# Altium PCB IO.PcbDoc
Units mm, origin at the board's own origin, x right, y up, seen from the top; angles counter-clockwise.
Board outline 41 x 13.02 mm, 4 copper layers (Top Layer, s, GND, Bottom Layer), stack 1.782 mm thick; 17 components, 57 nets, 142 pads, 75 vias.
Unrouted connection lines stored in the file: 2.
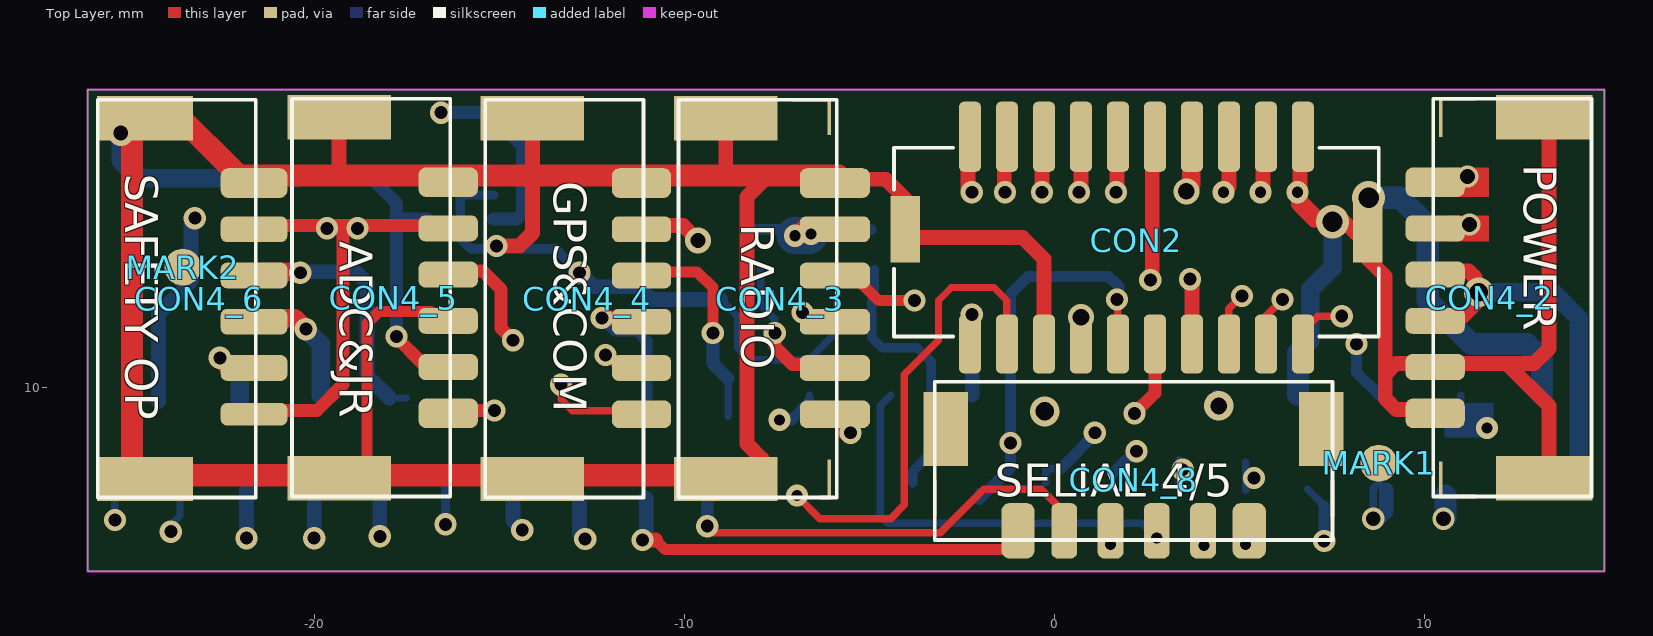
[diagram p0: Top Layer view]
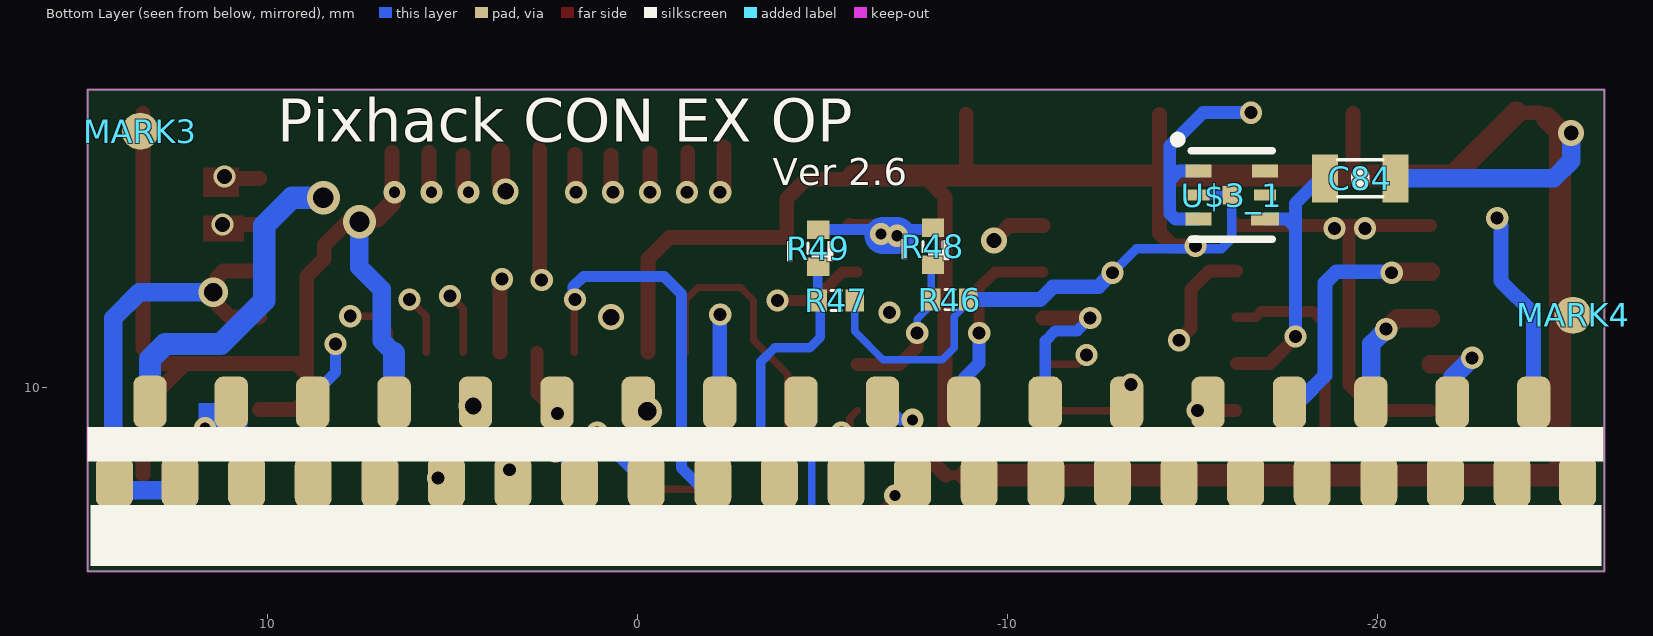
[diagram p1: Bottom Layer view, seen from below]
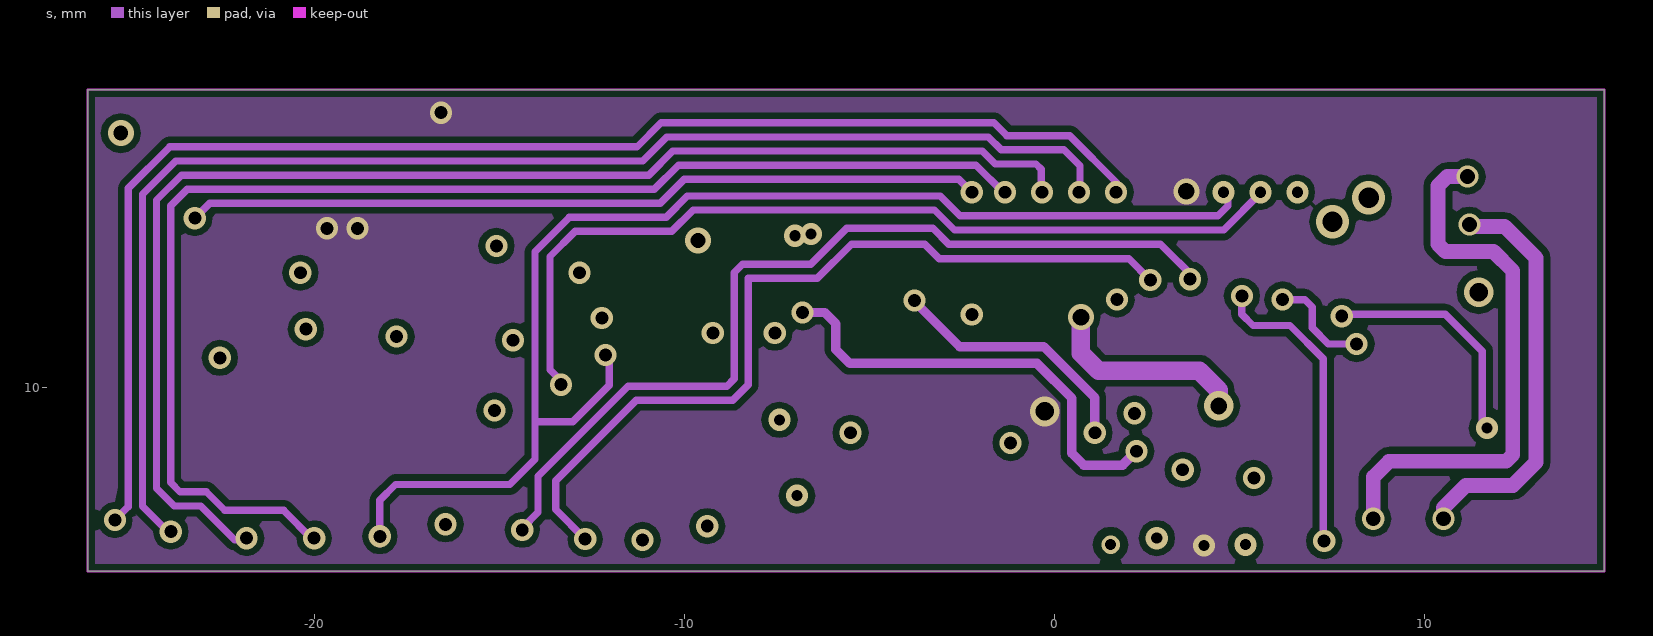
[diagram p2: s]
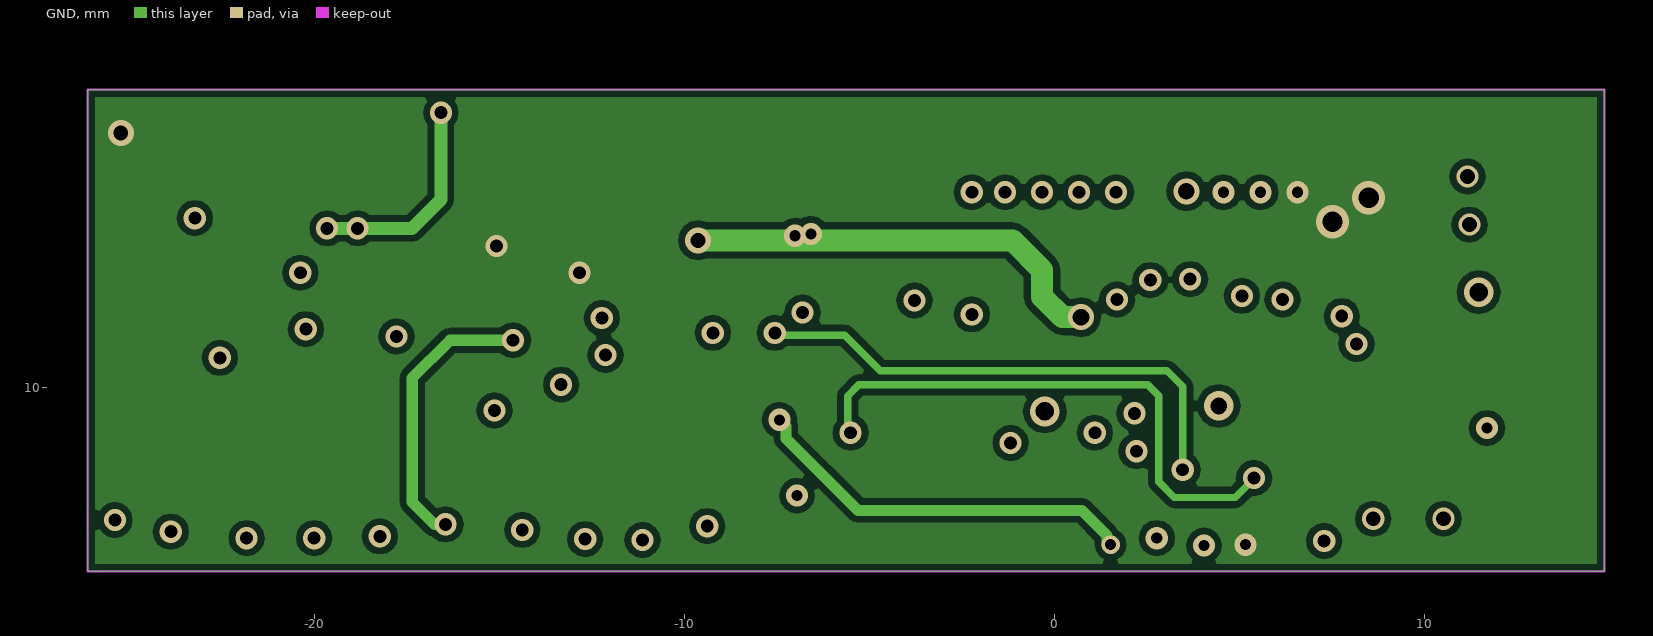
[diagram p3: GND]
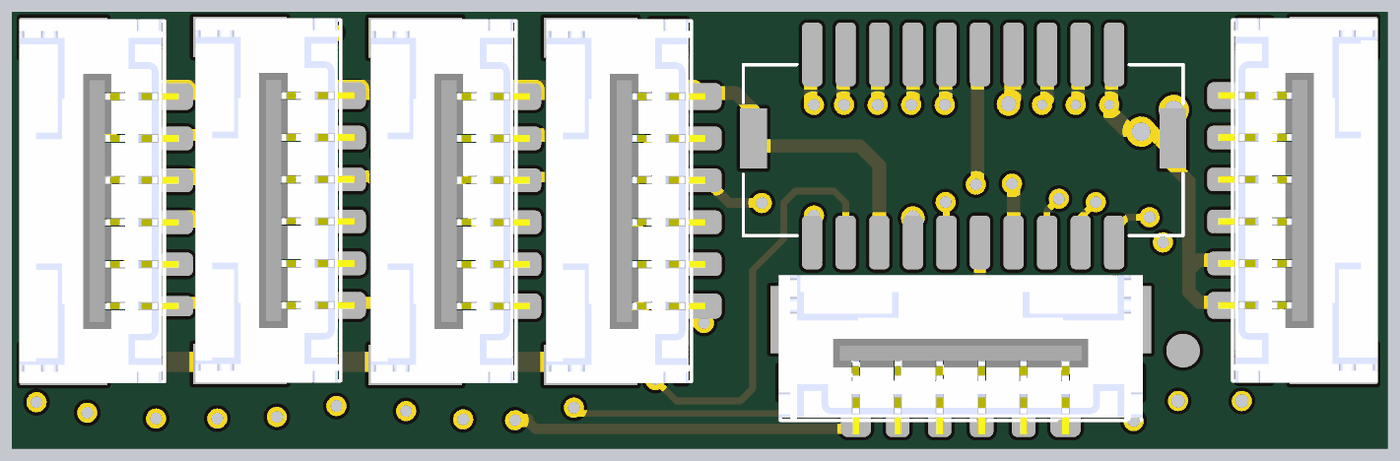
[diagram p4: 3D render of the assembled board from above, using the file's embedded part models]
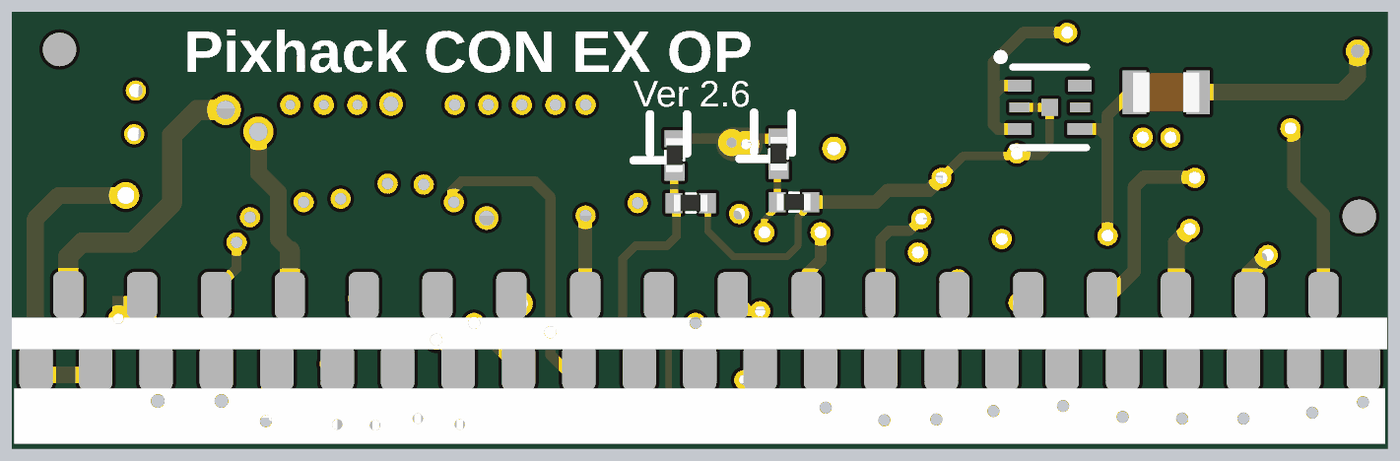
[diagram p5: 3D render of the assembled board from below, using the file's embedded part models]

## Layer stack, top to bottom
Top Layer: signal copper 0.0356
Dielectric: core 1, FR-4, Dk 4.8
s: signal copper 0.0356
Dielectric: prepreg 0.32, FR-4, Dk 4.8
GND: signal copper 0.0356
Dielectric: core 0.32, FR-4, Dk 4.8
Bottom Layer: signal copper 0.0356

## Board outline
-26.125,18.05 -26.125,5.025 14.875,5.025 14.875,18.05

## Design rules (kind name [scope] priority, off if disabled: settings)
Clearance [All] p1: gap=0.18
PolygonConnect [All vs OnLayer('Multi-Layer')] p1: connectstyle=Direct reliefconductorwidth=0.254 reliefentries=4 polygonreliefangle="90 Angle"
RoutingVias [All] p1: holewidth=0.711 width=1.27 viastyle="Through Hole" minholewidth=0.711 minwidth=1.27 maxholewidth=0.711 maxwidth=1.27
SilkscreenOverComponentPads [All] p1: minsilkscreentomaskgap=0.254
SolderMaskExpansion [All] p1: expansion=0.102
Width [All] p1: maxlimit=1 minlimit=0.2 preferedwidth=0.254 minimp=50.000000 maximp=50.000000 favimp=50.000000
27 further rules are at their usual default settings.

## Components (designator, comment, footprint, x,y, rotation, side; value= is the part's Value field where it differs from the comment)
C84 "2U2" 0805_CAP -19.525,15.65 r0 bottom
CON2 "SHD1X20" SHD1X20 2,13.875 r0 top
CON4_2 "POWER" GH1.25-6#1 10.2,12.45 r90 top
CON4_3 "RADIO" GH1.25-6#2 -5.825,12.375 r270 top
CON4_4 "GPS&COM" GH1.25-6#3 -11.05,12.375 r270 top
CON4_5 "ADC&JR" GH1.25-6#4 -16.275,12.4 r270 top
CON4_6 "SAFETY OP" GH1.25-6#5 -21.525,12.375 r270 top
CON4_8 "SELIAL 4/5" GH1.25-6#6 2.125,5.825 r180 top
MARK1 "" MARK 8.775,7.95 r90 top
MARK2 "" MARK -23.55,13.25 r90 top
MARK3 "" MARK 13.45,16.925 r270 bottom
MARK4 "" MARK -25.275,11.95 r270 bottom
R46 "100k" ? -8.425,12.375 r0 bottom
R47 "100k" ? -5.35,12.35 r0 bottom
R48 "100k" ? -7.975,13.825 r90 bottom
R49 "100k" ? -4.875,13.775 r90 bottom
U$3_1 "MIC5219-3V3" MLF-6 -16.05,15.2 r180 bottom (schematic designator U$3)

## Footprints (in the part's own frame and the unit in brackets; to place one, negate y for a bottom-side part, rotate by r counter-clockwise, add the part's x,y. Pads: shape width x height; smd on the part's side, far side on the other; paste and mask are expansions set on the pad)
0805_CAP [mm]
  rect 0.7x1.3 smd: 1(-0.95,0) 2(0.95,0)
  silkscreen extent -0.6,-0.5 0.6,0.5, body extent -1,-0.6 1,0.6, height 1.2
GH1.25-6#1 [mm]
  rect 1.2x2.6 smd: 0(-4.9,-3.05) 0(4.85,-3.05)
  rrect50% 0.8x1.6 smd: 1(-3.15,-0.1) 6(3.1,-0.1)
  rrect50% 0.7x1.6 smd: 2(-1.9,-0.1) 3(-0.65,-0.1) 4(0.6,-0.1) 5(1.85,-0.1)
  silkscreen extent -5.4,-4.32 5.35,-0.05, body extent -5.45,-4.38 5.4,0.37, height 4.5
GH1.25-6#2 [mm]
  rect 1.2x2.8 smd: 0(-4.9,-3.05) 0(4.85,-3.05)
  rrect50% 0.8x1.9 smd: 1(-3.15,-0.1)
  rrect50% 0.7x1.9 smd: 2(-1.9,-0.1) 3(-0.65,-0.1) 4(0.6,-0.1) 5(1.85,-0.1)
  rrect50% 0.75x1.9 smd: 6(3.1,-0.1)
  silkscreen extent -5.4,-4.32 5.35,-0.05, body extent -5.45,-4.38 5.4,0.37, height 4.5
GH1.25-6#3 [mm]
  rect 1.2x2.8 smd: 0(-4.9,-3.05) 0(4.85,-3.05)
  rrect50% 0.8x1.6 smd: 1(-3.15,-0.1)
  rrect50% 0.7x1.6 smd: 2(-1.9,-0.1) 3(-0.65,-0.1) 4(0.6,-0.1) 5(1.85,-0.1)
  rrect50% 0.75x1.6 smd: 6(3.1,-0.1)
  silkscreen extent -5.4,-4.32 5.35,-0.05, body extent -5.45,-4.38 5.4,0.37, height 4.5
GH1.25-6#4 [mm]
  rect 1.2x2.8 smd: 0(-4.9,-3.05) 0(4.85,-3.05)
  rrect50% 0.8x1.6 smd: 1(-3.15,-0.1) 6(3.1,-0.1)
  rrect50% 0.7x1.6 smd: 2(-1.9,-0.1) 3(-0.65,-0.1) 4(0.6,-0.1) 5(1.85,-0.1)
  silkscreen extent -5.4,-4.32 5.35,-0.05, body extent -5.45,-4.38 5.4,0.37, height 4.5
GH1.25-6#5 [mm]
  rect 1.2x2.6 smd: 0(-4.9,-3.05) 0(4.85,-3.05)
  rrect50% 0.8x1.8 smd: 1(-3.15,-0.1)
  rrect50% 0.7x1.8 smd: 2(-1.9,-0.1) 3(-0.65,-0.1) 4(0.6,-0.1) 5(1.85,-0.1)
  rrect50% 0.6x1.8 smd: 6(3.1,-0.1)
  silkscreen extent -5.4,-4.32 5.35,-0.05, body extent -5.45,-4.38 5.4,0.37, height 4.5
GH1.25-6#6 [mm]
  rect 1.2x2 smd: 0(-5.1,-3.05) 0(5.05,-3.05)
  rrect50% 0.9x1.5 smd: 1(-3.15,-0.3) 6(3.1,-0.3)
  rrect50% 0.7x1.5 smd: 2(-1.9,-0.3) 3(-0.65,-0.3) 4(0.6,-0.3) 5(1.85,-0.3)
  silkscreen extent -5.4,-4.32 5.35,-0.05, body extent -5.45,-4.38 5.4,0.37, height 4.5
MARK [mm]
  round 1 smd: 1(0,0)
MLF-6 [mm]
  rect 0.7x0.35 smd: 1(-0.9,0.65) 3(-0.9,-0.65) 6(0.9,0.65)
  rect 0.6x0.3 smd: 2(-0.9,0) 5(0.9,0)
  rect 0.75x0.35 smd: 4(0.9,-0.65)
  rect 0.5x0.5 smd: 7(0,0)
  silkscreen extent -1.52,-1.2 1.1,1.56, body extent -1.3,-0.9 1.3,0.9, height 1
SHD1X20 [mm]
  rect 0.8x1.8 smd: 0(-6.025,0.4) 0(6.475,0.4)
  rrect50% 0.6x1.6 smd: 1(-4.275,-2.7) 2(-3.275,-2.7) 3(-2.275,-2.7) 4(-1.275,-2.7) 5(-0.275,-2.7) 6(0.725,-2.7) 7(1.725,-2.7) 8(2.725,-2.7) 9(3.725,-2.7) 10(4.725,-2.7)
  rrect50% 0.6x1.9 smd: 11(4.725,2.9) 12(3.725,2.9) 13(2.725,2.9) 14(1.725,2.9) 15(0.725,2.9) 16(-0.275,2.9) 17(-1.275,2.9) 18(-2.275,2.9) 19(-3.275,2.9) 20(-4.275,2.9)
  silkscreen extent -6.32,-2.5 6.78,2.6
? [mm]
  rect 0.5x0.6 smd: 1(0.492,0.001) 2(-0.508,0.001)
  silkscreen extent -0.15,-0.27 0.12,0.28, body extent -0.5,-0.25 0.5,0.25, height 0.3

## Free pads (board coordinates)
  rect 1x0.1 smd: 0(-6.6,17.775) 0(10.9,7.05) 0(10.9,17.8)
  rect 0.3x0.1 smd: 0(-6.175,7.025)
  rect 0.1x1 smd: 0(-6.075,7.55) 0(-6.075,17.325) 0(-3.225,7) 0(7.525,7) 0(10.45,7.5) 0(10.45,17.275)
  rrect50% 0.9x1.4 smd far side: 1(-24.211,9.592) 2(-22.011,9.592) 3(-19.811,9.592) 4(-17.611,9.592) 5(-15.411,9.592) 6(-13.211,9.592) 7(-11.011,9.592) 8(-8.811,9.592) 9(-6.611,9.592) 10(-4.411,9.592) 11(-2.211,9.592) 12(-0.011,9.592) 13(2.189,9.592) 14(4.389,9.592) 15(6.589,9.592) 16(8.789,9.592) 17(10.989,9.592) 18(13.189,9.617)
  rrect50% 1x1.4 smd far side: 19(-25.4,7.45) 20(-23.625,7.45) 21(-21.825,7.45) 22(-20.025,7.45) 23(-18.225,7.45) 24(-16.425,7.45) 25(-14.625,7.45) 26(-12.825,7.45) 27(-11.025,7.45) 28(-9.225,7.45) 29(-7.425,7.45) 30(-5.625,7.45) 31(-3.825,7.45) 32(-2.025,7.45) 33(-0.225,7.45) 34(1.575,7.45) 35(3.375,7.45) 36(5.175,7.45) 37(6.975,7.45) 38(8.775,7.45) 39(10.575,7.45) 40(12.375,7.45) 41(14.15,7.45)

## Via types
v1: diameter 0.6, hole 0.35, Top Layer to Bottom Layer, 50 vias
v2: diameter 0.6, hole 0.3, Top Layer to Bottom Layer, 11 vias
v3: diameter 0.6, hole 0.4, Top Layer to Bottom Layer, 4 vias
v4: diameter 0.9, hole 0.55, Top Layer to Bottom Layer, 2 vias
v5: diameter 0.7, hole 0.4, Top Layer to Bottom Layer, 2 vias
v6: diameter 0.7, hole 0.45, Top Layer to Bottom Layer, 2 vias
v7: diameter 0.8, hole 0.5, Top Layer to Bottom Layer, 2 vias
v8: diameter 0.5, hole 0.3, Top Layer to Bottom Layer, 1 vias
v9: diameter 0.8, hole 0.45, Top Layer to Bottom Layer, 1 vias

## Nets (pads, with @x,y where several pads share a name; then routed paths per layer and width w, separated by ;. In a path a pad name is that pad's centre, name@x,y a point inside that pad or via, vN(x,y) a via of type N, cw(c..) or ccw(c..) an arc to the next point about the centre after c; other vN are vias at no path point)
3.3V: 
!IO-LED_SAFETY: CON4_6.5 pad.2 | length 2.5
  Top Layer w0.5: v1(-22.55,10.8) -22.375,10.625 CON4_6.5@-21.425,10.625
  Bottom Layer w0.5: v1(-22.55,10.8) -22.011,10.261 pad.2@-22.011,9.675
!SPI_EXT_NSS: CON2.17 pad.20 | length 38.7
  Top Layer w0.4: v1@0.725,15.275 CON2.17@0.725,16.275
  s w0.2: v1@-23.942,6.092 -24.64,6.79 -24.64,15.223 -23.743,16.12 -11.118,16.12 -10.468,16.77 -1.782,16.77 -1.432,16.42 0.268,16.42 0.7,15.988 v1@0.7,15.275
  Bottom Layer w0.2: v1(-23.875,6.1) -23.875,6.275 -23.625,6.525 pad.20@-23.625,7.25
  other v1: 0.675,15.275
ADC1_PROT: CON2.15 pad.26 | length 27.6
  Top Layer w0.2: CON2.15@2.6,16.425 CON2.15@2.725,16.55
  Top Layer w0.4: v1@2.65,12.9 CON2.15@2.65,16.425
  s w0.2: v1(-12.675,5.9) -13.475,6.7 -13.475,7.475 -11.298,9.652 -8.685,9.652 -8.265,10.073 -8.265,12.95 -6.4,12.95 -5.475,13.875 -3.5,13.875 -3.1,13.475 2.025,13.475 v1(2.6,12.9)
  Bottom Layer w0.2: v1@-12.825,6.05 v1(-12.675,5.9)
  Bottom Layer w0.4: v1@-12.825,6.05 pad.26@-12.825,7
ADC2_PROT: CON2.7 pad.25 | length 27.6
  Top Layer w0.4: CON2.7@3.725,10.95 v1@3.725,12.875
  s w0.2: v1@-14.35,6.225 -13.95,6.625 -13.95,7.6 -11.518,10.032 -8.843,10.032 -8.645,10.23 -8.645,13.107 -8.422,13.33 -6.575,13.33 -5.605,14.3 -3.275,14.3 -2.85,13.875 2.875,13.875 3.825,12.925 v1(3.675,12.925)
  Bottom Layer w0.4: pad.25@-14.625,7.25 -14.625,6.4 v1(-14.375,6.15)
ADC_VCC: 
ALARM: CON4_6.3 pad.4 | length 6.7
  Top Layer w0.5: CON4_6.3@-21.425,13.125 v1@-20.4,13.125
  Bottom Layer w0.2: pad.4@-17.964,9.714 pad.4@-17.514,9.714
  Bottom Layer w0.4: v1@-20.35,13.125 -18.875,13.125 -18.575,12.825 -18.575,10.325 pad.4@-17.964,9.714
  other v1: -20.375,13.1
BATT_CURRENT_SENS_PROT: CON4_2.5 pad.39 | length 12.6
  Top Layer w0.4: CON4_2.5@10.225,14.4 v3(11.225,14.4)
  s w0.4: v3(10.525,6.45) 10.525,6.75 11.125,7.35 12.4,7.35 13.025,7.975 13.025,13.5 12.175,14.35 v3@11.225,14.35
  Bottom Layer w0.2: v3(10.525,6.45) v3@10.575,6.5
  Bottom Layer w0.6: v3@10.575,6.5 pad.39@10.575,7.075
BATT_VOLTAGE_SENS_PROT: CON4_2.6 pad.38 | length 18
  Top Layer w0.4: CON4_2.6@10.225,15.65 v3@11.125,15.65
  s w0.4: v3(8.625,6.45) 8.625,7.575 9.055,8.005 12.218,8.005 12.395,8.182 12.395,13.155 11.875,13.675 10.575,13.675 10.375,13.875 10.375,15.45 10.625,15.7 v3(11.175,15.7)
  Bottom Layer w0.2: v3(8.625,6.45) 8.625,7.275 8.775,7.425 pad.38@8.975,7.225
  Bottom Layer w0.4: v3@8.775,6.45 8.975,6.65 pad.38@8.975,7.225
CAN1_RX: CON2.2 pad.29 | length 12.8
  Top Layer w0.2: v2(-6.95,7.075) -6.33,6.455 -4.42,6.455 -4.05,6.825 -4.05,10.35 -3.125,11.275 -3.125,12.35 -2.775,12.7 -1.625,12.7 -1.275,12.35 CON2.2@-1.275,10.95
CAN1_TX: CON2.1 pad.11 | length 3.2
  Top Layer w0.2: CON2.1@-2.275,10.95 -2.275,11.925 v1(-2.225,11.975)
  Bottom Layer w0.4: pad.11@-2.211,9.792 v1@-2.211,11.975
FMU-I2C1_SCL: CON2.13 CON4_4.5 pad.23 | length 38.3
  Top Layer w0.2: v1(-12.125,10.875) -11.875,10.625 CON4_4.5@-10.95,10.625
  Top Layer w0.4: v2(4.575,15.275) 4.725,15.425 CON2.13@4.725,16.275
  s w0.2: v1@-18.225,5.775 -18.225,6.95 -17.8,7.375 -14.712,7.375 -14.03,8.057 -14.03,9.075 ; v1@-12.025,10.875 -12.025,10.062 -13.012,9.075 -14.03,9.075 ; v2@4.7,15.275 4.7,14.912 4.423,14.635 -2.535,14.635 -3.075,15.175 -9.913,15.175 -10.488,14.6 -13.1,14.6 -14.03,13.67 -14.03,9.075
  Bottom Layer w0.4: v1(-18.225,5.975) pad.23@-18.225,7.25
FMU-I2C1_SDA: CON2.12 CON4_4.6 pad.6 | length 28
  Top Layer w0.2: v1(-13.325,10.075) -13.325,9.675 -13.025,9.375 CON4_4.6@-10.95,9.375
  Top Layer w0.4: v2@5.65,15.275 CON2.12@5.65,16.35
  s w0.2: v1@-13.225,10.075 -13.625,10.475 -13.625,13.538 -12.943,14.22 -10.331,14.22 -9.756,14.795 -3.233,14.795 -2.693,14.255 4.58,14.255 v2@5.6,15.275
  other v2: 5.575,15.275
FMU-UART7_RX: CON4_8.3 pad.10 | length 11.2
  Bottom Layer w0.2: pad.10@-4.411,9.792 -4.7,9.503 -4.7,6.529 -4.496,6.325 2.375,6.325 2.675,6.025 v2@2.675,5.75
  other v2: 2.775,5.925
FMU-UART7_TX: CON4_8.4 pad.9 | length 11.6
  GND w0.3: v2(-7.425,9.125) -7.25,8.95 -7.25,8.625 -5.3,6.675 0.751,6.675 1.425,6.001 v8@1.425,5.75
  Bottom Layer w0.2: pad.9@-6.625,9.778 pad.9@-6.611,9.792
  Bottom Layer w0.3: v2(-7.425,9.125) -7.103,9.125 pad.9@-6.611,9.617
  other v8: 1.525,5.75
FMU-UART8_TX: 
FMU-USART2_RX: 
FMU-USART3_RTS: 
FMU-VDD_3V3: C84.2 CON4_5.5 U$3_1.4 | length 7.7
  Top Layer w0.35: v1@-17.788,11.363 -17.075,10.65 CON4_5.5@-16.175,10.65
  Bottom Layer w0.35: C84.2 -18.45,15.65 -17.775,14.975 -17.775,14.325 ; v1(-17.775,11.375) -17.775,14.325 ; -17.725,14.55 -17.55,14.55 ; U$3_1.4 -17.55,14.55 ; -17.775,14.325 -17.55,14.55
FMU_AUX_ADC1_PROT: 
FMU_AUX_ADC2_PROT: 
GND: C84.1 CON2.0 CON2.3 CON2.11 CON4_2.0 CON4_2.1 CON4_2.2 CON4_3.0 CON4_3.1 CON4_4.0 CON4_4.1 CON4_5.0 CON4_5.1 CON4_5.4 CON4_6.0 CON4_6.1 CON4_8.1 pad.15 pad.18 R46.2 R47.2 U$3_1.2 U$3_1.7 | length 139.3
  Top Layer w0.254: CON4_5.4@-16.85,12.05 -16.7,11.9 CON4_5.4@-16.175,11.9 ; CON4_3.0@-8.875,7.625 CON4_3.0@-8.325,7.625
  Top Layer w0.3: CON4_5.0@-18.575,7.575 -18.575,11.725 -18.25,12.05 CON4_5.4@-16.85,12.05
  Top Layer w0.4: CON4_6.0@-24.375,17.425 CON4_6.0@-23.75,17.425 ; -19.325,15.75 -19.325,17.3 CON4_5.0@-19.325,17.4 ; v1(-15.075,13.825) -14.45,13.825 -14.1,14.175 -14.1,15.725 -14.1,17.275 CON4_4.0@-14.1,17.375 ; -8.875,15.75 CON4_3.0@-8.875,17.375 ; CON4_3.0@-8.325,7.625 -7.888,8.062 -8.3,8.475 -8.3,15.15 -7.825,15.625 CON4_3.1@-5.725,15.625 ; CON4_3.1@-5.825,15.725 CON4_3.1@-5.725,15.625 ; CON2.3@-0.275,10.95 -0.275,13.475 -0.85,14.05 -4.025,14.05 -4.025,15.1 -4.55,15.625 CON4_3.1@-5.725,15.625 ; 6.625,14.975 6.65,14.975 CON2.11@6.65,16.35 ; 7.05,14.575 7.75,14.575 8.475,13.85 8.475,13.475 8.95,13 8.95,10.35 ; 8.975,9.675 9.25,9.4 ; CON4_2.1@10.225,9.4 9.25,9.4 ; CON4_2.0@13.375,7.65 13.375,9.5 12.225,10.65 ; CON4_2.0@13.375,17.4 13.375,11.05 12.975,10.65 12.225,10.65 ; 8.95,10.35 8.95,9.7 9.25,9.4 ; 8.95,10.35 9.25,10.65 12.225,10.65
  Top Layer w0.5: 6.65,14.975 7.05,14.575
  Top Layer w0.6: CON4_6.0@-24.575,17.275 -24.925,16.925 -24.925,7.625 -14.1,7.625 CON4_3.0@-8.875,7.625 ; CON4_6.0@-23.75,17.425 -22.05,15.725 -14.1,15.725 CON4_3.1@-5.825,15.725
  Bottom Layer w0.2: R46.2@-9.008,12.374 -8.55,11.916 -8.55,11.075 -8.225,10.75 -6.625,10.75 -5.858,11.517 R47.2
  Bottom Layer w0.254: U$3_1.2 U$3_1.7 -16.05,14.025 -15.775,13.75 -13.475,13.75 v1(-12.825,13.1)
  Bottom Layer w0.4: v1(-12.825,13.1) -12.448,12.723 -11.223,12.723 -10.874,12.374 R46.2@-9.008,12.374 ; 7.475,13.2 7.525,13.25
  Bottom Layer w0.5: v5(-25.225,16.875) -25.225,16.125 -24.75,15.65 C84.1 ; 6.589,10.925 6.925,11.261 6.925,12.65 7.475,13.2 ; 7.525,13.25 v4(7.525,14.475)
  Bottom Layer w0.6: pad.15@6.589,9.792 6.589,10.925 ; v4(8.5,15.125) 9.35,15.125 10.1,14.375 10.1,12.35 11.275,11.175 12.775,11.175 13.189,10.761 pad.18@13.189,9.792
  other v2: 5.175,5.75 6.575,15.275
GPIO_EXT_1: CON2.20 pad.1 | length 28
  Top Layer w0.2: CON2.20@-2.325,16.5 CON2.20@-2.275,16.55
  Top Layer w0.4: v1@-2.325,15.375 CON2.20@-2.325,16.5
  s w0.2: v1(-23.225,14.575) -22.82,14.98 -10.645,14.98 -9.995,15.63 -2.58,15.63 -2.325,15.375 v1@-2.325,15.175
  Bottom Layer w0.4: pad.1@-24.211,9.617 -24.211,11.989 -23.325,12.875 v1@-23.325,14.375
  other v1: -2.225,15.275
GPS_RX: CON4_4.3 pad.8 | length 5.5
  Top Layer w0.3: CON4_4.3@-10.95,13.125 -9.65,13.125 -9.225,12.7 v1(-9.225,11.475)
  Bottom Layer w0.2: pad.8@-8.811,9.225 pad.8@-8.811,10.236
  Bottom Layer w0.35: v1(-9.225,11.475) -9.225,10.65 pad.8@-8.811,10.236
GPS_TX: CON4_4.4 pad.7 | length 4.4
  Top Layer w0.4: v1(-12.225,11.875) CON4_4.4@-10.95,11.875
  Bottom Layer w0.3: v1(-12.225,11.875) -11.875,11.525 -11.275,11.525 -11.011,11.261 pad.7@-11.011,9.617
IO-USART1_RX: CON4_5.6 pad.5 | length 1
  Top Layer w0.35: CON4_5.6@-16.15,9.375 v1(-15.125,9.375)
IO_UART1_RX: 
IV_IN: CON4_2.3 CON4_2.4 pad.40 pad.41 | length 12.7
  Top Layer w0.4: CON4_2.3@10.225,11.9 11.025,11.9 11.375,12.25 11.375,12.975 11.2,13.15 CON4_2.4@10.225,13.15
  Bottom Layer w0.5: v7(11.475,12.575) 13.475,12.575 14.175,11.875 14.175,7.225 pad.40@12.375,7.225
N$4: U$3_1.6
N$5: 
N$14: 
N$19: 
N$42: 
OP_VCC: CON2.14 CON4_5.2 CON4_6.2 CON4_6.6 CON4_8.2 pad.12 U$3_1.1 U$3_1.3 | length 25.6
  Top Layer w0.35: CON4_6.6@-21.425,9.375 -19.925,9.375 -19.225,10.075 -19.225,14.375 ; CON4_6.2@-21.425,14.375 v1@-18.825,14.375 ; v1@-19.65,14.375 -19.225,14.375 ; CON4_5.2@-16.175,14.4 -16.2,14.375 v1@-18.825,14.375 ; CON4_8.2@4.025,5.875 CON4_8.2@4.03,5.88 ; -19.225,14.375 v1@-18.825,14.375
  Top Layer w0.5: v6@3.7,15.475 CON2.14@3.7,16.35
  GND w0.35: v1(-19.65,14.3) v1(-18.825,14.3) -17.35,14.3 -16.575,15.075 v1(-16.575,17.425)
  Bottom Layer w0.35: v1(-16.575,17.425) -15.275,17.425 -14.375,16.525 -14.375,15.6 ; U$3_1.3 -14.525,14.55 -14.375,14.7 -14.375,15.325 -14.375,15.6 ; U$3_1.1 -14.625,15.85 -14.375,15.6
  other v2: 4.05,5.725
  other v6: 3.575,15.3
  other v7: -0.25,9.35
OTG_DM1: CON2.9 pad.16 | length 6.1
  Top Layer w0.2: CON2.9@5.725,10.95 5.725,11.925 v1(6.175,12.375)
  s w0.2: v1(6.175,12.375) 6.775,12.375 6.975,12.175 6.975,11.612 7.412,11.175 v1(8.175,11.175)
  Bottom Layer w0.3: v1(8.175,11.175) 8.175,10.406 pad.16@8.789,9.792
OTG_DP1: CON2.8 pad.37 | length 11.5
  Top Layer w0.2: CON2.8@4.725,10.95 4.725,12.125 v1(5.075,12.475)
  s w0.2: v1(5.075,12.475) 5.075,11.975 5.375,11.675 6.375,11.675 7.275,10.775 7.275,6.05 v1@7.475,5.85
  Bottom Layer w0.2: pad.37@6.85,7.25 pad.37@7.3,6.8
  Bottom Layer w0.3: v1(7.3,5.85) pad.37@7.3,6.8
PRESSURE_SENS_IN: CON4_5.3 pad.24 | length 11.7
  Top Layer w0.35: CON4_5.3@-16.175,13.15 -15.45,13.15 -14.95,12.65 -14.95,11.6 v1(-14.625,11.275)
  GND w0.3: v1(-16.45,6.3) -16.75,6.3 -17.35,6.9 -17.35,10.25 -16.325,11.275 v1(-14.625,11.275)
  Bottom Layer w0.254: v1(-16.45,6.3) pad.24@-16.45,7.4
RADIO_VCC: CON2.4 CON4_3.2 CON4_4.2 pad.14 R48.1 R49.1 | length 23.7
  Top Layer w0.4: CON4_4.2@-10.95,14.375 -10.025,14.375 v5(-9.625,13.975) ; v2(-7,14.1) -6.762,14.337 -6.75,14.35 -5.75,14.35 CON4_3.2@-5.725,14.375
  s w0.5: v6(0.725,11.9) 0.725,10.925 1.2,10.45 3.925,10.45 4.45,9.925 v9(4.45,9.5)
  GND w0.254: v5(-9.625,13.975) v5@-9.6,13.95
  GND w0.6: v5(-9.625,13.975) -1.125,13.975 ; -1.1,13.95 -0.325,13.175 -0.325,12.45 0.225,11.9 v6(0.725,11.9)
  Bottom Layer w0.3: R48.1@-8.124,14.267 R49.1@-4.949,14.267 ; pad.14@4.375,9.778 pad.14@4.389,9.792
  Bottom Layer w0.4: v2@-6.625,14.1 v2(-6.575,14.15)
  Bottom Layer w1: v2(-7,14.1) v2@-6.625,14.1
SAFETY: CON4_6.4 pad.3 | length 3.3
  Top Layer w0.5: CON4_6.4@-21.425,11.875 -20.525,11.875 v1(-20.225,11.575)
  Bottom Layer w0.5: v1(-20.225,11.575) -19.825,11.175 pad.3@-19.825,9.792
SERIAL1_CTS: CON4_3.5 pad.35 R46.1 R48.2 | length 18.7
  Top Layer w0.35: v1@-7.55,11.375 -7.55,11.1 -7.075,10.625 CON4_3.5@-5.925,10.625
  GND w0.2: v1@-7.512,11.412 -5.662,11.412 -4.7,10.45 3.05,10.45 3.475,10.025 v1(3.475,7.775)
  Bottom Layer w0.2: R46.1@-7.933,12.233 -7.55,11.85 v1@-7.55,11.375 ; R46.1 R48.2@-7.933,13.276 ; pad.35@3.375,7.225 pad.35@3.375,8.05
  other v1: -7.55,11.475
SERIAL1_RTS: CON4_3.6 pad.36 | length 16.5
  Top Layer w0.2: CON4_3.6@-5.925,9.375 -5.725,9.175 v1@-5.725,8.7
  GND w0.2: v1@-5.582,8.743 -5.582,9.768 -5.28,10.07 2.53,10.07 2.825,9.775 2.825,7.446 3.246,7.025 4.9,7.025 v1@5.4,7.525
  Bottom Layer w0.2: pad.36@5.175,7.225 pad.36@5.175,7.975
  other v1: 5.4,7.55 -5.5,8.775
SERIAL1_RX: CON4_3.3 pad.33 | length 11.6
  Top Layer w0.3: CON4_3.3@-5.925,13.125 -5.525,13.125 -4.75,12.35 v1(-3.775,12.35)
  s w0.254: v1@-3.875,12.425 -2.55,11.1 -0.275,11.1 1.1,9.725 v1(1.1,8.775)
  Bottom Layer w0.2: pad.33@-0.225,7.425 -0.225,7.8 pad.33@0.175,7.8
  Bottom Layer w0.3: pad.33@0.175,7.8 v1@1.125,8.75
SERIAL1_TX: CON4_3.4 pad.34 | length 13.4
  s w0.254: v1(-6.8,12.025) -6.2,12.025 -5.901,11.726 -5.901,11.026 -5.525,10.65 -0.463,10.65 0.475,9.712 0.475,8.225 0.8,7.9 1.85,7.9 v1(2.225,8.275)
  Bottom Layer w0.2: pad.34@1.575,7.425 pad.34@1.575,7.675
  Bottom Layer w0.3: pad.34@1.575,7.675 v1@2.275,8.375
SERIAL3_RX: 
SERIAL3_TX: 
SPI_EXT_MISO: CON2.18 pad.21 | length 38.5
  Top Layer w0.2: CON2.18@-0.35,16.35 CON2.18@-0.325,16.325
  Top Layer w0.4: v1(-0.325,15.275) CON2.18@-0.325,16.325
  s w0.2: v1@-21.825,5.875 -22.149,5.875 -23.069,6.795 -23.782,6.795 -24.26,7.273 -24.26,15.065 -23.585,15.74 -10.96,15.74 -10.31,16.39 -1.94,16.39 -1.59,16.04 -0.49,16.04 -0.35,15.9 v1@-0.35,15.275
  Bottom Layer w0.4: v1(-21.825,5.925) pad.21@-21.825,7.25
SPI_EXT_MOSI: CON2.19 pad.22 | length 37.6
  Top Layer w0.4: v1@-1.35,15.275 CON2.19@-1.35,16.35
  s w0.2: v1@-20.038,5.887 -20.825,6.675 -22.411,6.675 -22.911,7.175 -23.625,7.175 -23.88,7.43 -23.88,14.908 -23.428,15.36 -10.803,15.36 -10.153,16.01 -2.11,16.01 v1@-1.375,15.275
  Bottom Layer w0.4: v1(-20,5.925) pad.22@-20,7.225
  other v1: -1.325,15.275
SPI_EXT_SCK: CON2.16 pad.19 | length 39.6
  Top Layer w0.2: CON2.16@1.65,16.35 CON2.16@1.7,16.3
  Top Layer w0.4: v1@1.7,15.275 CON2.16@1.7,16.3
  s w0.2: v1(-25.386,6.414) -25.02,6.78 -25.02,15.38 -23.9,16.5 -11.275,16.5 -10.625,17.15 -1.625,17.15 -1.275,16.8 0.425,16.8 1.7,15.525 v1@1.7,15.275
  Bottom Layer w0.2: pad.19@-25.4,7.425 -25.386,7.411 v1(-25.386,6.414)
  other v1: 1.675,15.275
TELEM2_CTS: pad.31 R47.1 R49.2 | length 7.2
  Bottom Layer w0.254: R47.1@-4.933,12.349 -4.933,11.358 -4.65,11.075 -3.7,11.075 -3.326,10.701 -3.326,8.224 -3.825,7.725 pad.31@-3.825,7.425 ; R47.1 R49.2@-4.858,13.176
TELEM2_RTS: pad.30
TELEM2_RX: CON2.6 pad.13 | length 1.9
  Top Layer w0.35: v1(2.175,9.3) 2.725,9.85 CON2.6@2.725,10.95
TELEM2_TX: CON2.5 pad.32 | length 11.1
  Top Layer w0.2: v1(1.7,12.375) 1.725,12.35 CON2.5@1.725,10.95
  Bottom Layer w0.2: pad.32@-2.025,6.975 pad.32@-2.025,7.175
  Bottom Layer w0.3: pad.32@-2.025,6.975 -1.175,7.825 v1(-1.175,8.5) -1.175,12.525 -0.7,13 1.475,13 1.75,12.725 v1@1.75,12.375
TELEM4_RX: CON4_8.5 pad.28 | length 12.1
  Top Layer w0.2: v1(-9.375,6.25) -9.2,6.075 -3.075,6.075 -1.9,7.25 -0.35,7.25 0.3,6.6 CON4_8.5@0.3,6.2
  Bottom Layer w0.2: pad.28@-9.35,6.875 pad.28@-9.225,7
  Bottom Layer w0.35: v1(-9.375,6.25) pad.28@-9.375,7.275
TELEM4_TX: CON4_8.6 pad.27 | length 11.7
  Top Layer w0.2: v1(-11.125,5.875) v1@-11.125,6.075 ; CON4_8.6@-1.225,5.675 CON4_8.6@-0.975,5.925
  Top Layer w0.3: -10.775,5.875 -10.52,5.62 -1.28,5.62 CON4_8.6@-1.225,5.675
  Top Layer w0.4: v1(-11.125,5.875) -10.775,5.875
  Bottom Layer w0.2: v1(-11.125,5.875) v1@-11.025,5.975
  Bottom Layer w0.4: v1@-11.025,5.975 pad.27@-11.025,7
VBUS: CON2.10 pad.17 | length 9.4
  Top Layer w0.2: CON2.10@6.725,10.95 6.725,11.525 7.125,11.925 v1(7.775,11.925)
  s w0.2: v1@7.775,11.875 v1(7.775,11.925) 7.775,11.975 10.575,11.975 11.575,10.975 v2@11.575,8.875
  Bottom Layer w0.2: pad.17@10.989,9.792 10.989,9.461 v2@11.575,8.875
  other v2: 11.7,8.9
VDD_5V_BRICK: 
VDD_5V_IN: 
pads on no net: CON4_8.0 MARK1.1 MARK2.1 MARK3.1 MARK4.1 U$3_1.5

## Polygon pours and split planes (outlines as drawn)
OP_VCC on s "Top Layer-No Net" (solid, remove dead copper, pour order 2): -26.125,5 -26.125,18 14.875,18 14.875,5 -26.125,5
GND on GND "Top Layer-No Net" (solid, remove dead copper, pour order 4): 14.95,4.9 15.05,5 15.05,18 -26.55,18 -26.25,17.7 -26.25,5.05 15.2,5.05 15.3,4.95

## Keep-outs
Keep-Out Layer:
  the board outline again, w0.05

## Other copper
Top Layer:
  region net BATT_VOLTAGE_SENS_PROT: 10.775,15.95 10.775,15.15 11.75,15.15 11.75,15.95
  region net BATT_CURRENT_SENS_PROT: 10.65,14.65 10.65,13.95 11.75,13.95 11.75,14.65
Bottom Layer:
  region net VBUS: 10.55,9.575 10.55,8.65 11.875,8.65 11.875,9.575

## Silkscreen, mask and mechanical layers (free items; w line width, h text height)
Bottom Overlay:
  region: -26.1,8.925 -26.1,8 14.875,8 14.875,8.925
  region: -26.05,6.825 -26.05,5.175 14.8,5.175 14.8,6.825
  text "Pixhack CON EX OP" at 9.75,16.25 h2
  text "Ver 2.6" at -3.65,15.225 h1.25
  text "-" at -6.65,13.35 h1.52 r90
  text "-" at -7.775,13.325 h1.52 r90
  text "-" at -4.65,13.3 h1.52 r90
  text "-" at -3.55,13.3 h1.52 r90
  text "-" at -8.5,13.075 h1.52
  text "-" at -5.35,13.025 h1.52